# Altium PCB TSAL_AIL PCB.PcbDoc
Units mil, origin at the board's own origin, x right, y up, seen from the top; angles counter-clockwise.
Board outline 6000 x 4000 mil, 2 copper layers (Top Layer, Bottom Layer); 13 components, 12 nets, 32 pads, 0 vias.
Unrouted connection lines stored in the file: 20.
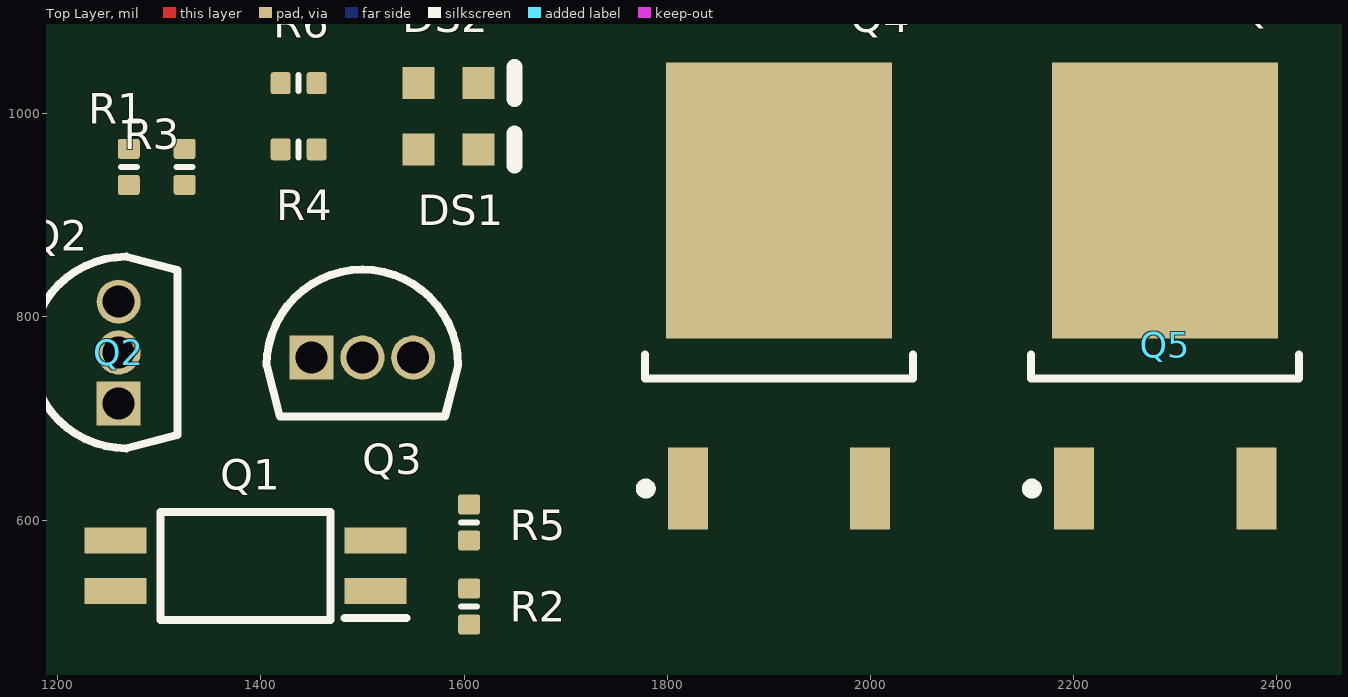
[diagram p0: Top Layer view]
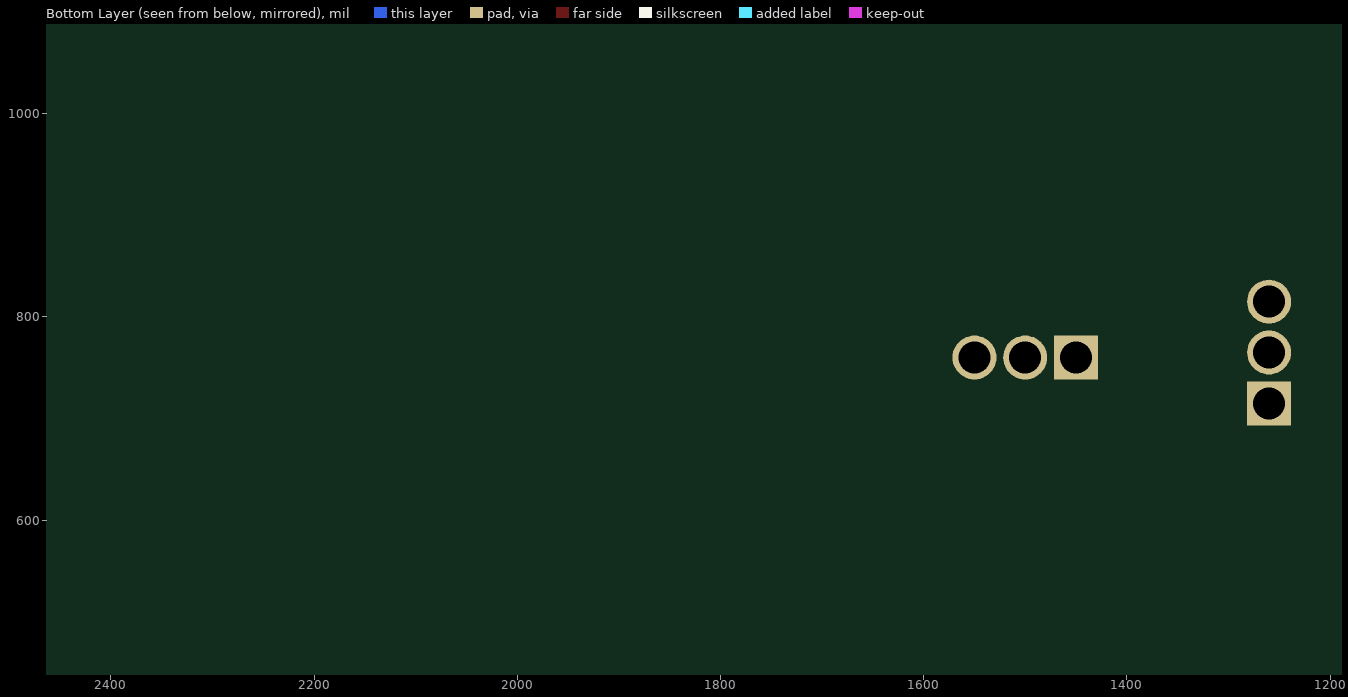
[diagram p1: Bottom Layer view, seen from below]

## Layer stack, top to bottom
Top Solder: solder mask 0.4, Solder Resist, Dk 3.5
Top Layer: signal copper 1.4
Dielectric 1: dielectric 12.6, FR-4, Dk 4.8
Bottom Layer: signal copper 1.4
Bottom Solder: solder mask 0.4, Solder Resist, Dk 3.5

## Board outline
0,0 6000,0 6000,4000 0,4000

## Design rules (kind name [scope] priority, off if disabled: settings)
Clearance [All] p1: gap=25 ignorepadtopadclearanceinfootprint=FALSE except(0: Arc-Hole Track-Hole SMDPad-Hole THPad-Hole Via-Hole Fill-Hole Poly-Hole Region-Hole Text-Hole)
PolygonConnect [All] p1: connectstyle=Relief reliefconductorwidth=10 reliefentries=4 polygonreliefangle="90 Angle" airgapwidth=10
RoutingVias [All] p1: holewidth=28 width=50 viastyle="Through Hole" minholewidth=28 minwidth=50 maxholewidth=28 maxwidth=50
SolderMaskExpansion [All] p1: expansion=4 istentingtop=FALSE
Width [All] p1: maxlimit=10 minlimit=10 preferedwidth=10
30 further rules are at their usual default settings.

## Components (designator, comment, footprint, x,y, rotation, side; value= is the part's Value field where it differs from the comment)
DS1 "HSMH-C190" AVAG-HSMX-C190_V 1584.52,965 r0 top
DS2 "HSMG-C190" AVAG-HSMX-C190_V 1584.52,1030 r0 top
Q1 "EL3H7(B)(TA)-VG" SOIC127P700X200-4N 1385,555 r180 top
Q2 "PN2222ABU" FAIR-TO-92 1260,765 r90 top
Q3 "PN2222ABU" FAIR-TO-92 1500,760 r0 top
Q4 "IPD50N06S4L-12" INF-PG-TO252-3-11_M 1910,820 r90 top
Q5 "IPD50N06S4L-12" INF-PG-TO252-3-11_M 2290,820 r90 top
R1 "Resistor 84K5 +/-1 % 0402 63 mW" RESC0402(1005)_L 1270,947.72 r270 top value=1k
R2 "Resistor 84K5 +/-1 % 0402 63 mW" RESC0402(1005)_L 1605,515 r90 top value=20.3k
R3 "Resistor 84K5 +/-1 % 0402 63 mW" RESC0402(1005)_L 1325,947.72 r270 top value=1k
R4 "Resistor 84K5 +/-1 % 0402 63 mW" RESC0402(1005)_L 1437.28,965 r0 top value=1k
R5 "Resistor 84K5 +/-1 % 0402 63 mW" RESC0402(1005)_L 1605,597.72 r90 top value=1k
R6 "Resistor 84K5 +/-1 % 0402 63 mW" RESC0402(1005)_L 1437.28,1030 r0 top value=1k

## Footprints (in the part's own frame and the unit in brackets; to place one, negate y for a bottom-side part, rotate by r counter-clockwise, add the part's x,y. Pads: shape width x height; smd on the part's side, far side on the other; paste and mask are expansions set on the pad)
AVAG-HSMX-C190_V [mm] "SMD, 2-Leads, Body 1.6x0.8mm, Height 0.9mm"
  rect 0.8x0.8 smd: 1(-0.75,0) 2(0.75,0)
  silkscreen extent 1.65,-0.4 1.65,0.4, body extent -0.8,-0.4 0.8,0.4, height 0.9
FAIR-TO-92 [mm] "TO, 3-Leads, Body Dia 4.79mm, Pitch 1.27mm"
  rect 1.1x1.1 hole 0.8: 1(-1.27,0)
  round 1.1 hole 0.8: 2(0,0) 3(1.27,0)
  silkscreen extent -2.39,-1.47 2.4,2.2, body extent -2.38,-1.47 2.38,2.19, height 4.82
INF-PG-TO252-3-11_M [mm] "DPAK, 3-Leads, Body 6.5x6.12mm, Pitch 2.28mm, IPC Low Density"
  rect 2.05x1 smd: 1(-4.8,2.28) 3(-4.8,-2.28)
  rect 6.9x5.65 smd: 2(2.4,0)
  silkscreen extent -4.92,-3.35 -1.45,3.45, body extent -2.05,-3.32 4.17,3.32, height 2.35
RESC0402(1005)_L [mm] "Chip Resistor, Body 1.0x0.5mm, IPC High Density"
  rrect25% 0.5x0.55 smd: 1(-0.45,0) 2(0.45,0)
  silkscreen extent 0,-0.2 0,0.2, body extent -0.5,-0.25 0.5,0.25, height 0.3
SOIC127P700X200-4N [mm]
  rect 1.55x0.65 smd: 1(-3.25,0.635) 2(-3.25,-0.635) 3(3.25,-0.635) 4(3.25,0.635)
  silkscreen extent -4.03,-1.35 2.12,1.35, body extent -3.5,-1.35 3.5,1.35, height 2

## Part data
DS1: library part CMP-007-00014-2, "LED Uni-Color Red, 65 mW, 20 mA, -40 to 85 degC, 2-Pin SMD, RoHS, Tape and Reel", Case/Package=0603, Colour=Red, Forward Current=20mA, Forward Voltage=1.8V, Manufacturer=Avago, Max Operating Temperature=85°C, Min Operating Temperature=-40°C, Package Description="2-Pin Surface Mount Device, Body 1.6 x 0.8 mm, Height 0.9 mm", Package Quantity=4000, Package Reference=HSMX-C190, Power=78mW, Datasheet URL=http://docs.avagotech.com/docs/AV02-0551EN, Datasheet Version=Mar-12, Illumination Colour=Red, Lens Style=Diffused, Luminous Intensity=17mcd, Manufacturer URL=http://www.avagotech.com/, Mounting Technology=SM, Nominal Vf=1.8V, Packaging=TapeandReel, Pins=2, RoHS Compliant=True, Viewing Angle=170degrees
DS2: library part CMP-007-00013-2, "LED Uni-Color Green, 52 mW, 20 mA, -40 to 85 degC, 2-Pin SMD, RoHS, Tape and Reel", Case/Package=0603, Colour=Green, Forward Current=20mA, Forward Voltage=2.2V, Manufacturer=Avago, Max Operating Temperature=85°C, Min Operating Temperature=-40°C, Package Description="2-Pin Surface Mount Device, Body 1.6 x 0.8 mm, Height 0.9 mm", Package Quantity=4000, Package Reference=HSMX-C190, Power=52mW, Datasheet URL=http://docs.avagotech.com/docs/AV02-0551EN, Datasheet Version=Mar-12, Illumination Colour=Green, Lens Style=Diffused, Luminous Intensity=15mcd, Manufacturer URL=http://www.avagotech.com/, Mounting Technology=SM, Nominal Vf=2.2V, Packaging=TapeandReel, Pins=2, RoHS Compliant=True, Viewing Angle=170degrees
Q1: library part EL3H7_B__TA_-VG, "Phototransistor", Manufacturer_Name=Everlight, Mouser Part Number=638-EL3H7BTAVG, Arrow Part Number=EL3H7(B)(TA)-VG, Arrow Price/Stock=https://www.arrow.com/en/products/el3h7-b-ta-vg/everlight-electronics?region=nac, Datasheet Link=https://everlightamericas.com/index.php?controller=attachment&id_attachment=2584, Height=2mm, Manufacturer_Part_Number=EL3H7(B)(TA)-VG, Mouser Price/Stock=https://www.mouser.co.uk/ProductDetail/Everlight/EL3H7BTA-VG?qs=8PzhAHr7IdPwN0NTF4wcmQ%3D%3D
Q2 Q3: library part CMP-013-00009-3, "NPN General-Purpose Amplifier, 40 V, -55 to 150 degC, 3-Pin TO-92, RoHS, Bulk", Case/Package=TO-226-3, Frequency=300MHz, Manufacturer=Fairchild, Max Operating Temperature=150°C, Min Operating Temperature=-55°C, Package Description="3-Pin Transistor Outline Package, Body Dia 4.79 mm, Pitch 1.27 mm", Package Quantity=1000, Package Reference=TO-92, Power=625mW, Datasheet URL=https://www.fairchildsemi.com/datasheets/PN/PN2222A.pdf, Datasheet Version="Rev. 1.1.0, 07/2014", Elements=1, hFE Min=100, Mounting Technology=TH, Packaging=Bulk, Pins=3, RoHS Compliant=True, Vce Max=1V
Q4 Q5: library part CMP-1138-00106-1, "OptiMOS-T2 Power-Transistor, 60 V VDS, 50 A ID, PG-TO252-3-11, Reel, Green", Manufacturer=Infineon, ComponentLink1Description="Manufacturer URL", ComponentLink1URL=http://www.infineon.com/, ComponentLink2Description=Datasheet, ComponentLink2URL=http://www.infineon.com/dgdl/IPD50N06S4L-12_DS_10.pdf?folderId=db3a30431a5c32f2011a8084a04a6500&fileId=db3a30431ff9881501203885cc580ca0&location=en.Products.Automotive_ICs.Automotive_MOSFETs.Single__N-Channel_60V_MOSFETs.DATASHEET.IPD50N06S4L-12_DS_10.pdf, ComponentLink3Description="Package Specification", ComponentLink3URL=http://www.infineon.com/dgdl/BTS142_DS_13.pdf?folderId=db3a3043163797a6011667aa084c0e01&fileId=db3a3043163797a6011667ac98be0e02&location=en.Products.Automotive_ICs.Smart_High-_and_Low-Side_Switches.HITFET___TEMPFET__-_Smart_Low-Side_Switches.DATASHEET.BTS1, DatasheetVersion="Rev. 1.0", Green=TRUE, Halogen-free=TRUE, ID (max)="50 A", IDpuls (max)="200 A", Mounting Technology="Surface Mount", PackageDescription="3-Pin Plastic (Green) Transistor Single Outline Package, 6.5 x 6.12 mm Body, 2.28 mm Pitch", PackageReference=PG-TO252-3-11, PackageVersion=Dec-06, Packing=Reel, PartNumber=IPD50N06S4L-12, Ptot (max)="50 W", QG="30 nC", RDS (on) (max) (@4.5V)="21.6 mOhm", RDS (on) (max) (@10V)="12 mOhm", RthJC (max)="3 K/W", Technology=OptiMOS-T2, VDS (max)="60 V", VGS(th) (max)="2.2 V", VGS(th) (min)="1.2 V"
R1 R2 R3 R4 R5 R6: library part CMP-009-00130-3, "Chip Resistor, 84,5 kOhms, +/-1 %, 63 mW, -55 to 155 degC, 0402", Case/Package=0402, Max Operating Temperature=155°C, Min Operating Temperature=-55°C, Power=63mW, Tolerance=1%, Pins=2

## Nets (pads, with @x,y where several pads share a name; then routed paths per layer and width w, separated by ;. In a path a pad name is that pad's centre, name@x,y a point inside that pad or via, vN(x,y) a via of type N, cw(c..) or ccw(c..) an arc to the next point about the centre after c; other vN are vias at no path point)
"+ HV": R2.1
"+ LV": R1.1 R3.1 R4.1 R6.1
Anode: Q1.1 R2.2
Cathode: Q1.2 R5.1
Collector: Q1.4 Q2.2 R1.2
Emitter: Q1.3 Q2.1 Q3.1 Q3.2 Q4.3 Q5.3
"HV GND": R5.2
"HV ON": DS1.2 Q4.2 Q5.1
"LV ON": DS2.2 Q5.2
NetDS1_1: DS1.1 R4.2
NetDS2_1: DS2.1 R6.2
NetQ2_3: Q2.3 Q3.3 Q4.1 R3.2